# EAGLE board newt_mkr__v1_r1 (EAGLE 9.6.2)
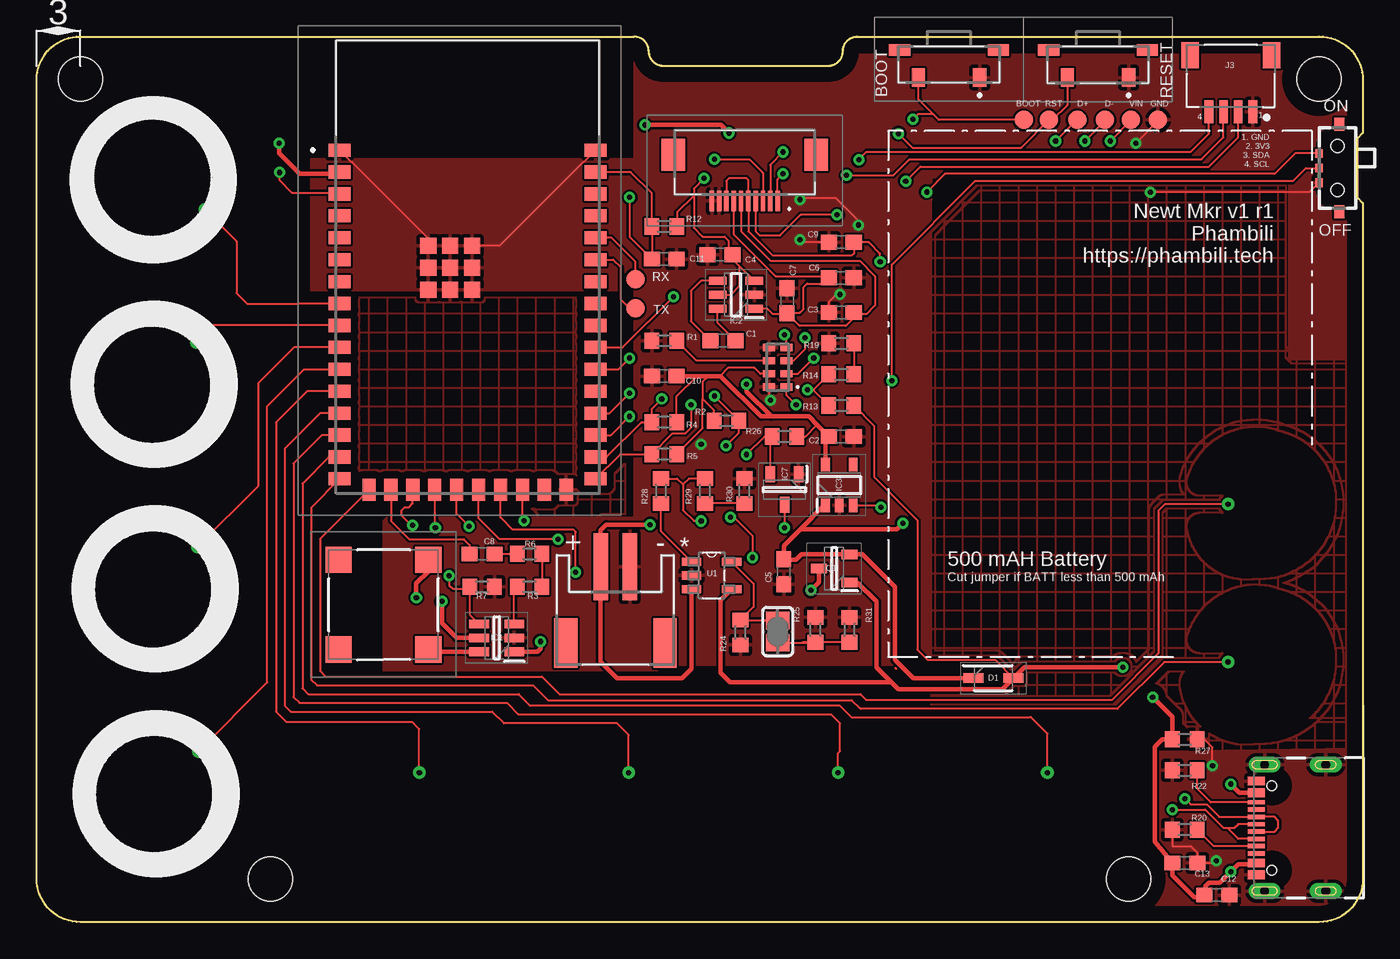
[diagram p0: board, top side]
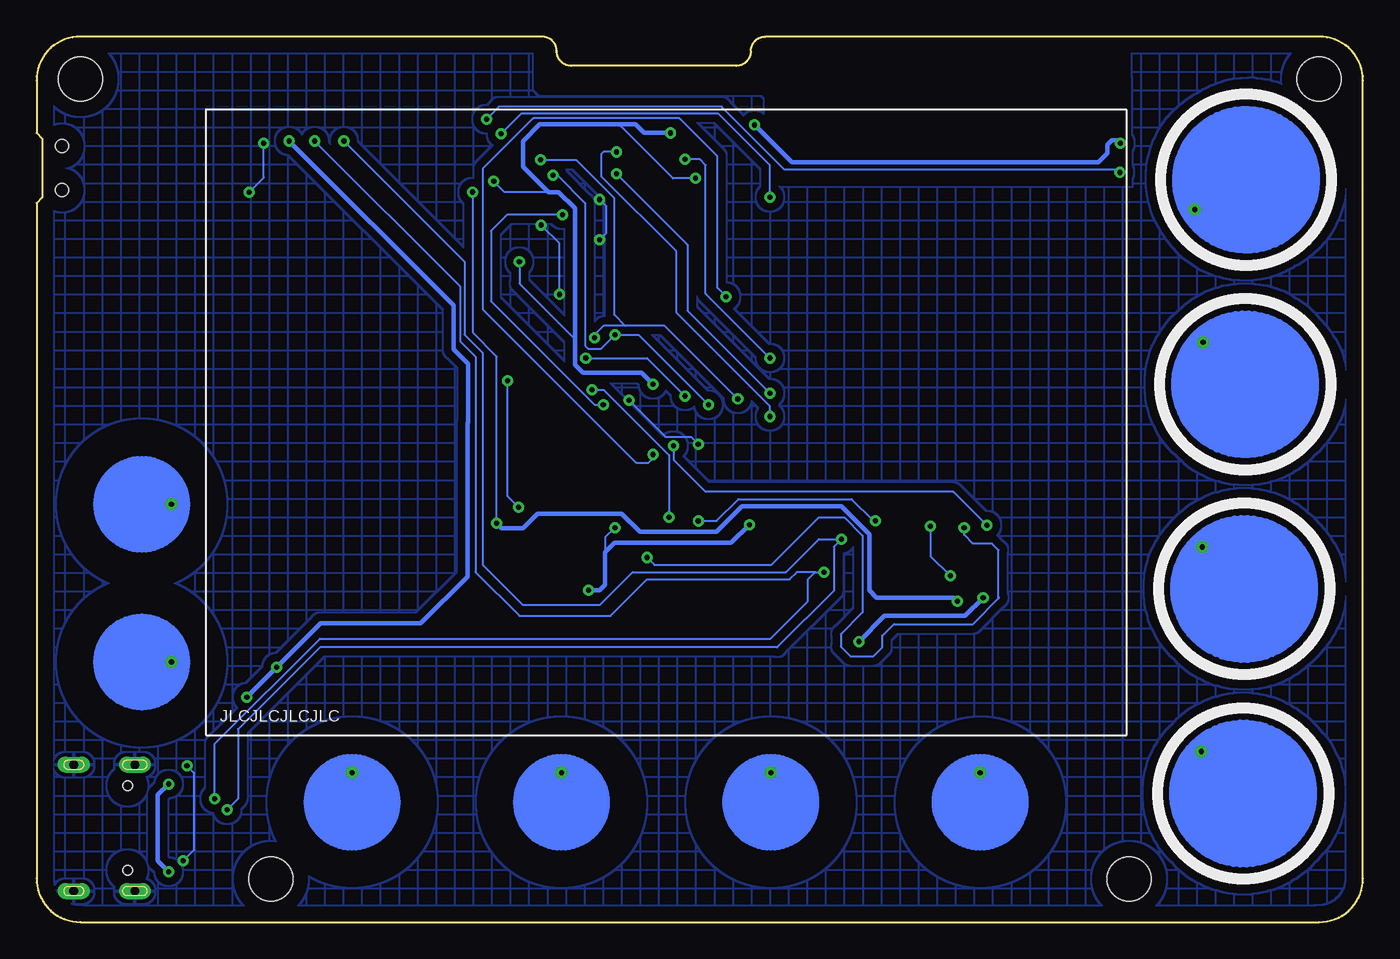
[diagram p1: board, bottom side, seen from below]

Size 90.8 x 60.6 mm. Coordinates in mm from the lower left corner, seen from the top.
Outline: 90.8,49.2 90.8,3 arc-90 87.8,0 3,0 arc-90 0,3 0,57.6 arc-90 3,60.6 40.9,60.6 arc-90 41.9,59.6 arc90 42.9,58.6 54.2,58.6 arc90 55.2,59.6 arc-90 56.2,60.6 87.8,60.6 arc-90 90.8,57.6 90.8,54 90.4,53.6 90.4,49.6 90.8,49.2
Copper layers (1*16): Top 0.035mm / dielectric 1.5mm / Bottom 0.035mm
Design rules "default": minimum track width 6mil, minimum drill 0.35mm, track to track 6mil, track to pad 6mil, pad to pad 6mil, via to via 6mil, smd to smd 6mil, copper to edge 40mil, drill to drill 6mil, minimum pad ring 10mil, minimum via ring 8mil, stop-mask expansion 4mil, vias tented up to drill 0mil, thermal gap 10mil
Holes 3 mm at 74.75,2.95 16,2.95 87.8,57.7 3,57.7

## Footprints (pad centres in the part's own frame; a part is rotated, then mirrored left to right if it is on the bottom)
BUTTON_PASSIVE_6MM = drill 0.356: BUTTON 0,2.032
BUTTON_PASSIVE_10MM = drill 0.356: BUTTON 0,4.064
C0603 = smd 1.1 x 1: 1 -0.85,0; 2 0.85,0
JST-PH-2-SMT-RA = smd 1 x 4.6: 1 1,-3.7; 2 -1,-3.7 | smd 1.6 x 3.4: NC1 -3.4,1.5; NC2 3.4,1.5
SODFL3517X110N = smd 1.37 x 0.63: 1 -1.375,0; 2 1.375,0
SOT95P280X145-6N = smd 1.35 x 0.6: 1 -1.2,0.95; 2 -1.2,0; 3 -1.2,-0.95; 4 1.2,-0.95; 5 1.2,0; 6 1.2,0.95
SOT95P280X145-6N' = smd 1.2 x 0.55: 1 -1.25,0.95; 2 -1.25,0; 3 -1.25,-0.95; 4 1.25,-0.95; 5 1.25,0; 6 1.25,0.95
SOT95P280X130-5N = smd 0.9 x 0.6: 1 -1.4,0.95; 2 -1.4,0; 3 -1.4,-0.95; 4 1.4,-0.95; 5 1.4,0.95
ESP32S2WROVERIM22S2H3216UH3Q0 = smd 1.5 x 0.9: 1 -7.56,8.05; 2 -7.56,6.55; 3 -7.56,5.05; 4 -7.56,3.55; 5 -7.56,2.05; 6 -7.56,0.55; 7 -7.56,-0.95; 8 -7.56,-2.45; 9 -7.56,-3.95; 10 -7.56,-5.45; 11 -7.56,-6.95; 12 -7.56,-8.45; 13 -7.56,-9.95; 14 -7.56,-11.45; 15 -7.56,-12.95; 16 -7.56,-14.45; 27 9.94,-14.45; 28 9.94,-12.95; 29 9.94,-11.45; 30 9.94,-9.95; 31 9.94,-8.45; 32 9.94,-6.95; 33 9.94,-5.45; 34 9.94,-3.95; 35 9.94,-2.45; 36 9.94,-0.95; 37 9.94,0.55; 38 9.94,2.05; 39 9.94,3.55; 40 9.94,5.05; 41 9.94,6.55; 42 9.94,8.05 | smd 0.9 x 1.5: 17 -5.56,-15.2; 18 -4.06,-15.2; 19 -2.56,-15.2; 20 -1.06,-15.2; 21 0.44,-15.2; 22 1.94,-15.2; 23 3.44,-15.2; 24 4.94,-15.2; 25 6.44,-15.2; 26 7.94,-15.2 | smd 1.1 x 1.1: 43 0,0; 44 -1.5,0; 45 -1.5,1.5; 46 0,1.5; 47 1.5,1.5; 48 1.5,0; 49 1.5,-1.5; 50 0,-1.5; 51 -1.5,-1.5
SOT96P240X110-3N = smd 1.1 x 0.65: 1 -1.05,0.96; 2 -1.05,-0.96; 3 1.05,0
528921033 = smd 0.3 x 1.4: 1 -2.25,2.65; 2 -1.75,2.65; 3 -1.25,2.65; 4 -0.75,2.65; 5 -0.25,2.65; 6 0.25,2.65; 7 0.75,2.65; 8 1.25,2.65; 9 1.75,2.65; 10 2.25,2.65 | smd 1.6 x 2.2: MP1 -4.9,-0.5; MP2 4.9,-0.5
JST_SM04B-SRSS-TB(LF)(SN) = smd 0.6 x 1.55: 1 -1.5,0; 2 -0.5,0; 3 0.5,0; 4 1.5,0 | smd 1.2 x 1.8: S1 -2.8,-3.875; S2 2.8,-3.875
GCT_USB4105-GF-A = smd 0.6 x 1.15: A1_B12 -3.2,4.755; A4_B9 -2.4,4.755; B1_A12 3.2,4.755; B4_A9 2.4,4.755 | smd 0.3 x 1.15: A5 -1.25,4.755; A6 -0.25,4.755; A7 0.25,4.755; A8 1.25,4.755; B5 1.75,4.755; B6 0.75,4.755; B7 -0.75,4.755; B8 -1.75,4.755 | drill 0.6 pad 1.05 long: S1 -4.32,4.18; S4 4.32,4.18 | drill 0.6 pad 1 long: S2 -4.32,0; S3 4.32,0 | hole 0.65: 2.89,3.68; -2.89,3.68
CMT752580SMTTR = smd 1.8 x 1.8: 1 -3.075,3.05; 2 -3.075,-3.1; 3 3.075,-3.1; 4 3.075,3.05
R0603 = smd 1 x 1.1: 1 -0.85,0; 2 0.85,0
TL3330AF130QG = smd 0.9 x 1.27: 1 -2.1,1.385; 2 2.1,1.385 | smd 1.45 x 0.8: 3 -3.375,-0.5; 4 3.375,-0.5
SSAJ110100_1 = smd 0.6 x 0.51: 1 -3.75,2.53; 2 -2.75,2.53; 3 -1.75,2.53 | smd 0.9 x 0.7: 4 -5.75,1.14; 5 0.25,1.14 | hole 0.9: -4.25,1.25; -1.25,1.25
MICROBUILDER_SOLDERJUMPER_CLOSEDWIRE = smd 1.168 x 1.6: 1 -0.762,0; 2 0.762,0 | smd 0.635 x 0.203: WIRE 0,0
PAD.03X.05 = smd 1.27 x 1.27: P$1 0,0
SOT95P300X145-5N = smd 1.321 x 0.559: 1 -1.372,0.94; 2 -1.372,0; 3 -1.372,-0.94; 4 1.372,-0.94; 5 1.372,0.94
RV-8803-C7 = smd 0.5 x 0.8: 1 -1.35,-0.6; 2 -0.45,-0.6; 3 0.45,-0.6; 4 1.35,-0.6; 5 1.35,0.6; 6 0.45,0.6; 7 -0.45,0.6; 8 -1.35,0.6

## Placement (x,y rotation side)
B1  [BUTTON_PASSIVE_6MM]  83.6,28.6 270 bottom
B2  [BUTTON_PASSIVE_6MM]  83.6,17.8 270 bottom
B3  [BUTTON_PASSIVE_6MM]  69.2,8.2 0 bottom
B4  [BUTTON_PASSIVE_6MM]  54.87,8.2 0 bottom
B5  [BUTTON_PASSIVE_6MM]  40.53,8.2 0 bottom
B6  [BUTTON_PASSIVE_6MM]  26.2,8.2 0 bottom
B7  [BUTTON_PASSIVE_10MM]  8,50.8 120 bottom
B8  [BUTTON_PASSIVE_10MM]  8.07,36.8 45 bottom
B9  [BUTTON_PASSIVE_10MM]  8.13,22.8 45 bottom
B10  [BUTTON_PASSIVE_10MM]  8.2,8.8 45 bottom
C1  1uF  [C0603]  47,39.78 0 top
C2  10 uF  [C0603]  55.09,33.23 180 top
C3  1uF  [C0603]  55.09,41.72 0 top
C4  10uF  [C0603]  46.78,45.67 0 top
C5  10 uF  [C0603]  51.16,23.97 90 top
C6  1uF  [C0603]  55.09,44.1 180 top
C7  10uF  [C0603]  51.37,42.52 270 top
C8  0.1uF  [C0603]  30.5,25.2 0 top
C9  0.1uF  [C0603]  55.09,46.52 0 top
C10  0.1uF  [C0603]  42.97,37.37 180 top
C11  1uF  [C0603]  42.97,45.37 180 top
C12  0.1uF  [C0603]  80.8,1.85 0 top
C13  10uF  [C0603]  78.6,4.05 0 top
CN1  [JST-PH-2-SMT-RA]  39.62,20.61 180 top
D1  PMEG2010ER,115  [SODFL3517X110N]  65.5,16.7 0 top
IC1  PAM8301AAF  [SOT95P280X145-6N]  31.5,19.45 180 top
IC2  AP3602AKTR-G1  [SOT95P280X145-6N']  47.88,42.93 180 top
IC3  XC6220B331MR-G  [SOT95P280X130-5N]  54.95,29.91 90 top
IC4  ESP32-S2-WROVER-I_M22S2H3216UH  [ESP32S2WROVERIM22S2H3216UH3Q0]  28.32,44.78 0 top
IC7  APX803L40-36SA-7  [SOT96P240X110-3N]  51.2,29.6 270 top
J1  52892-1033  [528921033]  48.47,52 180 top
J3  SM04B-SRSS-TB(LF)(SN)  [JST_SM04B-SRSS-TB(LF)(SN)]  81.75,55.45 180 top
J4  USB4105-GF-A  [GCT_USB4105-GF-A]  88.25,6.45 90 top
LS1  CMT-7525-80-SMT-TR  [CMT752580SMTTR]  23.75,21.7 180 top
Q1  DMG2301L-7  [SOT96P240X110-3N]  54.6,24.2 180 top
R1  10K  [R0603]  42.97,39.78 180 top
R2  10K  [R0603]  47.23,34.31 0 top
R3  10K  [R0603]  33.75,22.95 0 top
R4  10K  [R0603]  42.97,34.22 0 top
R5  10K  [R0603]  42.97,32.02 0 top
R6  10K  [R0603]  33.75,25.2 180 top
R7  100K  [R0603]  30.5,22.95 0 top
R12  10K  [R0603]  42.97,47.6 0 top
R13  10k  [R0603]  55.09,35.35 180 top
R14  5.1k  [R0603]  55.09,37.48 180 top
R19  10k  [R0603]  55.09,39.6 0 top
R20  5.1k  [R0603]  78.6,6.33 180 top
R22  5.1k  [R0603]  78.6,10.38 180 top
R24  5.1k  [R0603]  48.18,19.82 90 top
R25  5.1k  [R0603]  53.31,20 270 top
R26  10k  [R0603]  51.2,33.23 0 top
R27  100k  [R0603]  78.6,12.5 0 top
R28  10k  [R0603]  42.75,29.5 90 top
R29  5.1k  [R0603]  45.75,29.5 90 top
R30  10k  [R0603]  48.45,29.5 270 top
R31  10k  [R0603]  55.65,20 270 top
S7  TL3330AF130QG  [TL3330AF130QG]  62.46,59.18 180 top
S8  TL3330AF130QG  [TL3330AF130QG]  72.66,59.17 180 top
S17  SSAJ110100  [SSAJ110100_1]  90.31,54.35 90 top
SJ2  [MICROBUILDER_SOLDERJUMPER_CLOSEDWIRE]  50.73,19.88 270 top
TP1  TEST-POINT3X5  [PAD.03X.05]  41,44 0 top
TP2  TEST-POINT3X5  [PAD.03X.05]  41,42 0 top
TP3  TEST-POINT3X5  [PAD.03X.05]  67.58,54.9 180 top
TP4  TEST-POINT3X5  [PAD.03X.05]  69.3,54.9 0 top
TP5  TEST-POINT3X5  [PAD.03X.05]  76.77,54.9 0 top
TP6  TEST-POINT3X5  [PAD.03X.05]  74.93,54.9 0 top
TP7  TEST-POINT3X5  [PAD.03X.05]  71.24,54.9 180 top
TP8  TEST-POINT3X5  [PAD.03X.05]  73.14,54.9 180 top
U1  MCP73831T-2ATI/OT  [SOT95P300X145-5N]  46.21,23.72 0 top
Y1  RV-3028-C7_32.768KHZ_1PPM_TA_Q  [RV-8803-C7]  50.74,37.97 90 top

## Library data of the parts
B1-B10 = PatternAgents-TouchWidgets
C1-C13 = eagle-ltspice; SPICEMODEL: NONE; SPICEPREFIX: C
CN1 R1-R7 R12-R14 R19 R20 R22 R24-R31 = adafruit
D1 = PMEG2010ER_115; DESCRIPTION: NXP PMEG2010ER,115 SMT Schottky Diode, 20V 1A, 2-Pin SOD-123; HEIGHT: 1.1mm; MANUFACTURER_NAME: Nexperia; MANUFACTURER_PART_NUMBER: PMEG2010ER,115; MOUSER_PART_NUMBER: 771-PMEG2010ER115; MOUSER_PRICE-STOCK: https://www.mouser.co.uk/ProductDetail/Nexperia/PMEG2010ER115?qs=LMSg3oBIm%2FjLN28PGE8ULg%3D%3D
IC1 = PAM8301AAF; DESCRIPTION: Audio Amplifiers 1.5W MONO FILTERLESS CLASS-D AUDIO AMP; HEIGHT: 1.45mm; MANUFACTURER_NAME: Diodes Inc.; MANUFACTURER_PART_NUMBER: PAM8301AAF; MOUSER_PART_NUMBER: 621-PAM8301AAF; MOUSER_PRICE-STOCK: https://www.mouser.co.uk/ProductDetail/Diodes-Incorporated/PAM8301AAF?qs=pYVYkI7xuRV6vlW3YKulRw%3D%3D
IC2 = AP3602AKTR-G1; DESCRIPTION: Switching Voltage Regulators LED Backlight; HEIGHT: 1.45mm; MANUFACTURER_NAME: Diodes Inc.; MANUFACTURER_PART_NUMBER: AP3602AKTR-G1; MOUSER_PART_NUMBER: 621-AP3602AKTR-G1; MOUSER_PRICE-STOCK: https://www.mouser.co.uk/ProductDetail/Diodes-Incorporated/AP3602AKTR-G1?qs=5V6w%252Be2aIqZe7SZnxovZqw%3D%3D
IC3 = XC6220B331MR-G; DESCRIPTION: TOREX - XC6220B331MR-G - IC, LDO, 1A, 3.3V, SOT-25; HEIGHT: 1.3mm; MANUFACTURER_NAME: Torex; MANUFACTURER_PART_NUMBER: XC6220B331MR-G; MOUSER_PART_NUMBER: 865-XC6220B331MR-G; MOUSER_PRICE-STOCK: https://www.mouser.co.uk/ProductDetail/Torex-Semiconductor/XC6220B331MR-G?qs=AsjdqWjXhJ8lRh0WBUyqoQ%3D%3D
IC4 = ESP32-S2-WROVER-I_M22S2H3216UH; DESCRIPTION: WiFi Modules (802.11) Module ESP32-S2 WROVER IPEX ANT; HEIGHT: 3.45mm; MANUFACTURER_NAME: Espressif Systems; MANUFACTURER_PART_NUMBER: ESP32-S2-WROVER-I(M22S2H3216UH3Q0); MOUSER_PART_NUMBER: 356-ESP32S2WRVI321PH; MOUSER_PRICE-STOCK: https://www.mouser.co.uk/ProductDetail/Espressif-Systems/ESP32-S2-WROVER-IM22S2H3216UH3Q0/?qs=vHuUswq2%252BszxnrhiZVBtvw%3D%3D
IC7 = APX803L40-36SA-7; DESCRIPTION: Supervisory Circuits 3.6V, 450ms Reset Ge nerator; HEIGHT: 1.1mm; MANUFACTURER_NAME: Diodes Inc.; MANUFACTURER_PART_NUMBER: APX803L40-36SA-7
J1 = 52892-1033; DESCRIPTION: MOLEX - 52892-1033 - FFC / FPC Board Connector, ZIF, 0.5 mm, 10 Contacts, Receptacle, Easy-On 52892 Series; HEIGHT: 2mm; MANUFACTURER_NAME: Molex; MANUFACTURER_PART_NUMBER: 52892-1033; MOUSER_PART_NUMBER: 538-52892-1033; MOUSER_PRICE-STOCK: https://www.mouser.co.uk/ProductDetail/Molex/52892-1033/?qs=s7UCm7gO1bYFQIHRMDmdTA%3D%3D
J3 = SM04B-SRSS-TB_LF__SN_; DESCRIPTION: Connector Header Surface Mount, Right Angle 4 position 0.039 (1.00mm); DIGI-KEY_PART_NUMBER: 455-1804-1-ND; MF: JST Sales; MP: SM04B-SRSS-TB(LF)(SN); PACKAGE: None; PURCHASE-URL: https://pricing.snapeda.com/search/part/SM04B-SRSS-TB(LF)(SN)/?ref=eda
J4 = USB4105-GF-A; AVAILABILITY: In Stock; DESCRIPTION: USB-C (USB TYPE-C) USB 2.0 Receptacle Connector 24 (16+8 Dummy) Position Surface Mount, Right Angle; Through Hole; MF: GCT; MP: USB4105-GF-A; PACKAGE: None; PRICE: None; PURCHASE-URL: https://pricing.snapeda.com/search/part/USB4105-GF-A/?ref=eda
LS1 = CMT-7525-80-SMT-TR; DESCRIPTION: Piezo Buzzers & Audio Indicators buzzer, 7.5 mm, 2.5 mm deep, M, 3.6 V, 80 dB, Surface Mount (SMT), Audio Transducer; HEIGHT: 2.7mm; MANUFACTURER_NAME: CUI Inc.; MANUFACTURER_PART_NUMBER: CMT-7525-80-SMT-TR; MOUSER_PART_NUMBER: 490-CMT-7525-80SMTTR; MOUSER_PRICE-STOCK: https://www.mouser.co.uk/ProductDetail/CUI-Devices/CMT-7525-80-SMT-TR?qs=P1JMDcb91o5izP7Xira9ww%3D%3D
Q1 = DMG2301L-7; DESCRIPTION: MOSFET MOSFET BVDSS; HEIGHT: 1.1mm; MANUFACTURER_NAME: Diodes Inc.; MANUFACTURER_PART_NUMBER: DMG2301L-7; MOUSER_PART_NUMBER: 621-DMG2301L-7; MOUSER_PRICE-STOCK: https://www.mouser.co.uk/ProductDetail/Diodes-Incorporated/DMG2301L-7/?qs=60RJRzIpcl8mqpUzCaZuxQ%3D%3D
S7 S8 = TL3330AF130QG; DESCRIPTION: E-SWITCH - TL3330AF130QG - SWITCH, TACTILE, SPST, 50mA, 12VDC; HEIGHT: 3.4mm; MANUFACTURER_NAME: E-Switch; MANUFACTURER_PART_NUMBER: TL3330AF130QG; MOUSER_PART_NUMBER: 612-TL3330AF130QG; MOUSER_PRICE-STOCK: https://www.mouser.co.uk/ProductDetail/E-Switch/TL3330AF130QG?qs=cyOInwlKnROuSmh9LtfUhw%3D%3D
S17 = SSAJ110100; DESCRIPTION: Slide Switches slide switch with location lug; HEIGHT: mm; MANUFACTURER_NAME: ALPS; MANUFACTURER_PART_NUMBER: SSAJ110100; MOUSER_PART_NUMBER: 688-SSAJ110100; MOUSER_PRICE-STOCK: https://www.mouser.co.uk/ProductDetail/ALPS/SSAJ110100?qs=35GPJvxY%252Bl7i4HLNNvKQzg%3D%3D
SJ2 = Adafruit AT42QT1010 Breakout
TP1-TP8 = SparkFun-Connectors
U1 = Microchip_By_element14_Batch_1; MPN: MCP73831T-2ATI/OT; OC_FARNELL: 1834890; OC_NEWARK: 84R5196; PACKAGE: SOT23-5; SUPPLIER: Microchip
Y1 = RV-3028-C7_32.768kHz_1ppm_TA_Q; DESCRIPTION: Real Time Clock 32.768kHz I2C Time Acc. 1ppm; HEIGHT: mm; MANUFACTURER_NAME: Micro Crystal AG; MANUFACTURER_PART_NUMBER: RV-3028-C7 32.768kHz 1ppm TA QA; MOUSER_PART_NUMBER: 428-203603-MG01; MOUSER_PRICE-STOCK: https://www.mouser.co.uk/ProductDetail/Micro-Crystal/RV-3028-C7-32768kHz-1ppm-TA-QA/?qs=u16ybLDytRbtEIHDRVfMwQ%3D%3D

## Nets
3.3EN: IC3.3 S17.2
+3V3: C2.2 C4.2 C9.2 C10.1 IC2.3 IC2.5 IC3.5 IC4.2 J1.5 J1.8 J3.2 R2.1 R4.2 R5.2 R12.2 R26.2 Y1.7
+5V: C3.2 C6.2 C7.2 IC2.1 J1.6 J1.7
BOOT: IC4.3 S7.2 TP3.P$1
BUTTON_A: B1.BUTTON IC4.17
BUTTON_B: B2.BUTTON IC4.16
BUTTON_C: B3.BUTTON IC4.15
BUTTON_D: B4.BUTTON IC4.14
BUTTON_E: B5.BUTTON IC4.13
BUTTON_F: B6.BUTTON IC4.12
BUZZER: C8.1 IC4.18
CC2: J4.B5 R22.1
CHRG_STAT: IC4.24 R28.2 R29.2
D+: IC4.23 J4.A6 J4.B6 TP8.P$1
D-: IC4.22 J4.A7 J4.B7 TP7.P$1
DISPLAY_CS: IC4.32 J1.3
GND: C2.1 C3.1 C4.1 C5.1 C6.1 C7.1 C9.1 C10.2 C11.1 C12.2 C13.2 CN1.2 IC1.2 IC2.2 IC3.2 IC4.1 IC4.26 IC4.42 IC4.43 IC4.44 IC4.45 IC4.46 IC4.47 IC4.48 IC4.49 IC4.50 IC4.51 IC7.1 J1.9 J1.10 J3.1 J4.A1_B12 J4.B1_A12 J4.S1 J4.S2 J4.S3 J4.S4 R1.2 R7.2 R19.1 R20.2 R22.2 R24.1 R25.1 R27.2 R30.1 R31.1 S7.1 S8.1 S17.1 TP5.P$1 U1.2 Y1.5 Y1.8
LBO: IC4.33 IC7.2 R26.1
MISO: IC4.31
MOSI: IC4.29 J1.2
N$1: IC1.6 LS1.1
N$2: IC1.1 LS1.2
N$3: R1.1 Y1.6
N$4: R14.1 R19.2
N$5: C1.2 IC2.6
N$6: C1.1 IC2.4
N$7: IC1.3 R3.1
N$8: R29.1 R30.2
N$11: R25.2 R31.2 SJ2.2
N$12: R3.2 R6.1
N$13: C8.2 R6.2
N$15: J4.A5 R20.1
PAD_1: B7.BUTTON IC4.8
PAD_2: B8.BUTTON IC4.9
PAD_3: B9.BUTTON IC4.10
PAD_4: B10.BUTTON IC4.11
PROG: R24.2 SJ2.1 U1.5
PSRAM_CS: IC4.25
RESET: C11.2 IC4.41 R12.1 S8.2 TP4.P$1
RTC_CLKOUT: J1.4 Y1.1
RTC_INT: IC4.19 R2.2 Y1.2
RXD: IC4.38 TP1.P$1
SCK: IC4.30 J1.1
SCL: IC4.28 J3.4 R4.1 Y1.3
SDA: IC4.27 J3.3 R5.1 Y1.4
SPKR_CTRL: IC1.4 IC4.21 R7.1
STAT: R28.1 U1.1
TXD: IC4.37 TP2.P$1
USB_IN: IC4.20 R13.2 R14.2
VBATT: CN1.1 IC7.3 Q1.3 U1.3
VCC: C12.1 C13.1 D1.2 J4.A4_B9 J4.B4_A9 Q1.1 R13.1 R27.1 TP6.P$1 U1.4
VDD: C5.2 D1.1 IC1.5 IC3.1 Q1.2 S17.3

## Tracks (layer width: path | path; a pad name or v marks a point on that pad's centre or on a via)
3.3EN  (via drill 0.35)
  Top 0.152: IC3.3 57.69,28.51 v57.8,28.4 | S17.2 86.9,51.6 86,50.7 64.25,50.7 58.55,45 v58.55,37.05
  Bottom 0.152: v57.8,28.4 58.55,29.15 v58.55,37.05
+3V3  (via drill 0.35)
  Top 0.152: R4.2 43.82,35.99 45.2,37.37 45.4,37.37 | R2.1 46.38,35.02 45.6,35.8 | 45.6,35.8 45.6,36.97 46,37.37 | Y1.7 49.54,37.52 49.14,37.92 47.35,37.92 46.8,37.37 | R26.2 52.63,33.23 53.42,34.03 53.44,34.04 | R5.2 45.6,33.8 45.6,35.8 | C9.2 55.88,46.52 | IC2.5 47.53,42.93 48.13,43.53 48.13,44.88 | IC2.3 48.13,44.88 | 48.13,44.88 47.63,45.38 C4.2 47.4,45.9 47.4,46.6 47.1,46.9 45.6,46.9 45,47.5 45,49.7 | v59.5,50.7 60.5,51.7 80.25,51.7 82.25,53.7 J3.2 | J1.5 48.73,47.28 50.4,45.6 55.8,45.6 55.94,45.74 C9.2 | v57.75,45.2 57.75,45.75 56.98,46.52 C9.2 | R12.2 43.86,47.56 43.86,48.56 45,49.7 | v45.7,50.9 45,50.2 45,49.7 | J1.5 48.73,49.38 | J1.5 48.73,50.78 48.6,50.9 47.4,50.9 47.23,50.73 J1.8
  Top 0.305: 53.44,34.04 52.87,34.6 50.3,34.6 | 50.3,34.6 49.6,34.6 46.83,37.37 46.8,37.37 46,37.37 45.4,37.37 C10.1 | 50.3,34.6 48.6,36.3 v48.6,36.8 | IC3.5 54,32.99 C2.2 54.18,33.23 54.18,33.27 53.42,34.03 | IC4.2 20.63,51.2 18,51.2 16.6,52.6 v16.6,53.3 | v41.65,54.55 46.85,54.55 v47.4,54
  Bottom 0.152: v57.75,45.2 57.75,43.7 53.95,39.9 | v45.7,50.9 47.24,50.9 50.8,54.46 50.8,54.6 | 55.5,49.95 58.75,49.95 v59.5,50.7
  Bottom 0.305: v48.6,36.8 49.4,37.6 53.4,37.6 53.95,38.15 53.95,39.9 53.95,48.85 55.05,49.95 55.5,49.95 55.75,49.95 57.5,51.7 57.5,53.45 56.35,54.6 50.8,54.6 49.8,54.6 49.2,54 v47.4,54 | v41.65,54.55 39.1,52 18.1,52 17.5,52.6 17.5,53.2 17.2,53.5 16.8,53.5 v16.6,53.3
+5V
  Top 0.152: 55.94,41.6 55.94,41.34 55.4,40.8 52.24,40.8 C7.2 | 55.94,41.6 C3.2 | J1.7 47.73,47.08 50.6,44.2 54.14,44.2 C6.2 54.24,43.94 54,43.7 52.75,43.7 52.5,43.45 52.5,41.95 52.25,41.7 51.4,41.7 C7.2 | 55.94,41.6 56.8,41.6 57.4,42.2 57.4,44.2 56.35,45.25 50.25,45.25 48.23,47.28 J1.6 | C7.2 51.3,41.6 50.4,41.6 50.02,41.98 IC2.1
BOOT  (via drill 0.35)
  Top 0.152: v16.65,51.3 16.65,50.75 17.48,49.93 20.66,49.93 IC4.3 | S7.2 60.36,56.3 61.34,55.31 | v60,54.95 60.36,55.31 61.34,55.31 | TP3.P$1 61.76,54.9 61.34,55.31
  Top 0.305: IC4.3 20.73,49.8
  Bottom 0.152: v16.65,51.3 16.85,51.5 39.6,51.5 43.9,55.8 59.15,55.8 v60,54.95
BUTTON_A
  Top 0.152: IC4.17 19.4,26.22 19.4,17.2 19.8,16.8 34.6,16.8 35.8,15.6 56.4,15.6 56.8,15.2 73.6,15.2 76.8,18.4 76.8,28.15 77.25,28.6 B1.BUTTON
BUTTON_B
  Top 0.152: IC4.16 18.8,28.37 18.8,16.6 19.2,16.2 34,16.2 35,15.2 55.8,15.2 56.4,14.6 74,14.6 77.2,17.8 B2.BUTTON
  Bottom 0.152: 81.47,17.7 B2.BUTTON 81.52,17.75
BUTTON_C
  Top 0.152: IC4.15 20.03,31.83 18.2,30 18.2,16 18.6,15.6 33,15.6 33.8,14.8 55,14.8 55.77,14.03 68,14.03 68.07,14.03 69.2,12.9 B3.BUTTON
BUTTON_D
  Top 0.152: IC4.14 19.53,33.33 17.6,31.4 17.6,15.4 18,15 32.2,15 33,14.2 54.4,14.2 55,13.6 55,11.7 54.87,11.57 B4.BUTTON
BUTTON_E
  Top 0.152: IC4.13 19.43,34.83 17,32.4 17,14.8 17.4,14.4 31.2,14.4 32,13.6 39.75,13.6 40.53,12.82 B5.BUTTON
  Bottom 0.152: B5.BUTTON 40.5,10.27
BUTTON_F
  Top 0.152: IC4.12 18.53,36.33 16.4,34.2 16.4,14.4 17.1,13.7 25.7,13.7 26.1,13.3 26.2,13.2 B6.BUTTON
BUZZER
  Top 0.152: IC4.18 24.26,27.44 25.5,26.2 29.25,26.2 29.65,25.8 C8.1
CC2
  Top 0.152: J4.B5 80.38,8.2 79.45,9.13 R22.1
CHRG_STAT  (via drill 0.35)
  Top 0.152: 42.85,30.35 R28.2 43.85,30.35 44.25,29.95 | R29.2 44.65,30.35 44.25,29.95 | 44.25,29.95 44.25,28.2 45,27.45 v45.5,27.45 | v33.37,27.47 33.26,27.58 IC4.24
  Bottom 0.152: v33.37,27.47 33.52,27.47 35,28.95 42.75,28.95 44.25,27.45 v45.5,27.45
D+  (via drill 0.35)
  Top 0.152: v36.9,23.95 36.9,26.7 36.75,26.85 32.6,26.85 31.76,27.69 IC4.23 | J4.A6 84.75,6.2 85,6.45 85,6.95 84.75,7.2 J4.B6 80.95,7.2 80.1,8.05 79.01,8.05 v78.61,8.45 | TP8.P$1 73.14,54.84 v71.75,53.45
  Bottom 0.152: v71.75,53.45 61.8,43.51 61.8,39.76 60.75,38.7 60.75,23.95 57.75,20.95 51.5,20.95 49,23.45 39.25,23.45 38.75,23.95 37.5,23.95 | 37.5,23.95 v36.9,23.95 | 37.5,23.95 38,23.45 38,21.95 40.55,19.4 71.4,19.4 78.61,12.19 v78.61,8.45
D-  (via drill 0.35)
  Top 0.152: v35.7,26.2 31.7,26.2 30.26,27.64 IC4.22 | J4.A7 82.25,6.7 82,6.45 81.5,6.45 | J4.B7 82.25,5.7 81.5,6.45 | v77.75,7.7 80,7.7 81.25,6.45 81.5,6.45 | TP7.P$1 71.21,54.9 v69.76,53.45 v69.75,53.45
  Bottom 0.152: v77.75,7.7 77,8.45 77,13.2 71.4,18.8 40.1,18.8 36.23,22.68 36.23,25.68 v35.7,26.2 37.25,26.2 39.5,23.95 50,23.95 52.25,21.7 57.5,21.7 60.25,24.45 60.25,38.95 61.5,40.2 61.5,45.19 v69.76,53.45
DISPLAY_CS  (via drill 0.35)
  Top 0.152: IC4.32 39.83,37.83 v40.6,38.6 | v46.4,52.2 48.8,52.2 49.73,51.28 J1.3
  Bottom 0.152: v40.6,38.6 45,43 45,51.8 45.4,52.2 v46.4,52.2
GND  (via drill 0.35)
  Top 0.152: IC4.1 21.58,52.01 21.61,52.01 26.82,46.79 IC4.45 | IC4.42 37.44,52.01 37.41,52.01 31.69,46.28 IC4.47 | C3.1 54.24,42.44 54.75,42.95 v55,42.95 | C9.1 52.43,46.52 v52.25,46.7 | v52.25,49.45 52.35,49.55 54.71,49.55 56.25,48.01 v56.25,47.7 | Y1.8 50.14,36.06 50.25,35.95 v50.25,35.7 | 36.26,29.21 IC4.26 | S17.1 87.13,49.95 v76.25,49.95 | v75.25,53.31 76.77,54.83 TP5.P$1 | R20.2 77.75,5.2 79,5.2 79.45,4.75 C13.2 80.6,4.05 v80.75,4.2 | v80.5,10.7 80.5,11.95 79.95,12.5 R27.2
  Bottom 0.152: v55,42.95 55,46.45 v56.25,47.7 | v50.25,35.7 47.76,33.21 46.95,33.21 46.94,33.2 46,33.2 v45.5,32.7 | v52.25,49.45 51.8,49.01 51.8,47.15 v52.25,46.7 | v76.25,49.95 75.25,50.95 v75.25,53.31 | v80.75,4.2 80,4.95 80,10.2 v80.5,10.7
  pour Top (isolate 0.508, hatched): 0.43,60.51 0.43,0.69 0.81,0.31 90.09,0.31 90.09,38.11 90,38.2 86,38.2 85.5,38.7 85.5,50.45 61.5,50.45 61.5,38.19 61.5,17.01 40.31,17.01 40.31,41.9 40.69,42.29 40.24,42.73 17.89,42.73 17.57,43.05 17.57,60.38 17.45,60.51
  pour Top: 42.4,52.19 18.78,52.19 18.78,43.24 42.4,43.24
  pour Top: 90.13,38.49 86.21,38.49 85.75,38.45 85.75,50.95 61.25,50.95 61.14,38.49 61.14,17.58 41.32,17.58 40.94,17.96 40.94,59.56 89.97,59.56
  pour Bottom (isolate 0.508, hatched): 15.79,50.35 15.73,50.29 39.92,50.29 41,51.37 41,56.38 41.13,56.51 56.37,56.51 56.82,56.95 56.82,59.56 57.45,60.19 90.28,60.19 90.41,60.07 90.41,0.31 90.79,-0.07 0.68,-0.07 0.55,0.06 0.55,60.26 0.62,60.32 15.79,60.32 15.86,60.26
  pour Top: 26.5,27.7 42.5,27.7 42.5,17.2 23.75,17.2 23.75,27.45 24,27.7
  pour Top: 90.5,11.91 90.5,2.2 88.75,0.45 76.5,0.45 76.5,11.7 76.75,11.7
  pour Top (isolate 0.02, hatched): 62,50.7 85.5,50.7 85.5,39.45 86,38.95 90,38.95 89.78,13.95 61.25,13.95 61.25,49.95
LBO  (via drill 0.35)
  Top 0.152: IC7.2 50.24,33.12 R26.1 49.83,33.23 v48.6,32 | IC4.33 40.13,39.33 v43.6,42.8
  Bottom 0.152: v43.6,42.8 44.2,43.4 44.2,52.4 46.8,55 56.8,55 60.25,51.55 60.25,41.95 49.75,31.45 48.9,31.45 48.6,31.75 v48.6,32
MOSI  (via drill 0.35)
  Top 0.152: IC4.29 39.33,33.33 v40.6,34.6 | v51.1,52.7 50.23,51.83 J1.2
  Bottom 0.152: v40.6,34.6 40.6,35.3 47,41.7 47,45.9 52.15,51.05 52.15,52.55 52,52.7 v51.1,52.7
N$1
  Top 0.305: 26.82,19.27 LS1.1 26.98,18.5 IC1.6
N$2  (via drill 0.35)
  Top 0.305: IC1.1 34.3,18.5 34.5,18.7 v34.5,19.2 | v26,22.2 26,23.2 26.82,24.02 LS1.2
  Bottom 0.305: v34.5,19.2 32.75,20.95 27.25,20.95 v26,22.2
N$3
  Top 0.152: Y1.6 45.18,38.42 R1.1
N$4
  Top 0.152: R19.2 R14.1
N$5
  Top 0.152: C1.2 46.63,41 IC2.6
N$6
  Top 0.152: IC2.4 45.48,43.88 44.8,43.2 44.8,41.13 C1.1
N$7
  Top 0.152: IC1.3 32.7,22.75 R3.1
N$8
  Top 0.152: R30.2 R29.1
N$9
  Top 0.152: 58.85,17.33 58.78,17.39
N$11
  Top 0.152: SJ2.2 52.4,19.12 | 52.4,19.12 53.28,19.12 R25.2 | R31.2 52.43,19.15 52.4,19.12
N$12
  Top 0.152: R6.1 R3.2
N$13
  Top 0.152: C8.2 R6.2
N$15
  Top 0.152: R20.1 80.58,5.2 J4.A5
PAD_1
  Top 0.152: IC4.8 18.34,42.33 17.96,42.33 14.42,42.33 13.7,43.05 13.7,46.59 B7.BUTTON
PAD_2
  Top 0.152: IC4.9 12.1,40.83 B8.BUTTON
PAD_3
  Top 0.152: B9.BUTTON 15.2,29.87 15.2,36.9 17.43,39.13 17.63,39.33 IC4.10 20.56,39.13
PAD_4
  Top 0.152: B10.BUTTON 15.8,16.4 15.8,35.3 18.33,37.83 IC4.11
PROG
  Top 0.152: U1.5 49.08,23.16 49.08,21.57 R24.2 50.7,20.67 SJ2.1
RESET  (via drill 0.35)
  Top 0.152: IC4.41 40.67,51.33 42.12,49.88 R12.1 C11.2 40.6,46.89 v40.6,49.6 | 69.55,54.65 TP4.P$1 | S8.2 70.56,55.91 69.55,54.9 TP4.P$1 | v59,53.95 59.95,53.01 67.41,53.01 TP4.P$1
  Bottom 0.152: v40.6,49.6 40.6,51.8 44.1,55.3 57.65,55.3 v59,53.95
RTC_CLKOUT  (via drill 0.35)
  Top 0.152: v52,35.4 51.34,36.06 Y1.1 | J1.4 49.23,47.28 49.5,47 50.9,47 52.3,48.4 v54.8,48.4
  Bottom 0.152: v52,35.4 52.6,35.4 59.7,42.5 59.7,47.3 58.6,48.4 v54.8,48.4
RTC_INT  (via drill 0.35)
  Top 0.152: Y1.2 52.12,37.52 v53.2,38.6 | v47.2,32.6 48.08,33.48 48.08,34.2 | 48.08,34.2 R2.2 | v46.4,36 48,34.4 48,34.28 48.08,34.2 | v25.75,27.15 25.65,27.15 25,27.8 25,28.2 25.2,28.4 25.5,28.4 25.76,28.66 IC4.19
  Bottom 0.152: v47.2,32.6 47.15,32.55 47.15,31.6 45,29.45 28.05,29.45 v25.75,27.15 | v53.2,38.6 49,38.6 v46.4,36
RXD
  Top 0.152: TP1.P$1 41,45.2 39.37,46.83 IC4.38
SCK  (via drill 0.35)
  Top 0.152: IC4.30 39.23,34.83 v40.6,36.2 | J1.1 50.73,50.83 v51.1,51.2
  Bottom 0.152: v51.1,51.2 46.25,46.35 46.25,41.85 v40.6,36.2
SCL  (via drill 0.35)
  Top 0.152: IC4.28 39.03,31.83 41.42,34.22 R4.1 42.12,35.12 v42.8,35.8 | v52.6,40 52.6,39.2 51.82,38.42 Y1.3 | v56.29,52.16 56.83,52.7 79,52.7 80.25,53.95 J3.4
  Bottom 0.152: v42.8,35.8 47.8,40.8 50.5,40.8 | 50.5,40.8 52,40.8 52.6,40.2 v52.6,40 | 50.5,40.8 51.25,41.55 51.25,49.55 53.86,52.16 v56.29,52.16
SDA  (via drill 0.35)
  Top 0.152: IC4.27 39.08,31.15 39.1,31.15 39.97,32.02 R5.1 43.54,33.44 44.41,33.44 44.8,33.83 v44.8,35.4 | Y1.4 51.34,40.06 v51.2,40.2 v51.2,40.19 | v55.45,51.1 58.65,51.1 59.75,52.2 79.75,52.2 81.25,53.7 J3.3
  Bottom 0.152: v44.8,35.4 49.59,40.19 v51.2,40.19 52.19,39.21 53,39.21 53.25,39.46 53.25,49.2 55.15,51.1 v55.45,51.1
SPKR_CTRL  (via drill 0.35)
  Top 0.152: IC1.4 29.65,21.05 R7.1 29.5,22.8 28.5,22.8 28.25,23.05 v28.25,23.7 | v29.6,27.1 28.76,27.94 IC4.21
  Bottom 0.152: v29.6,27.1 29.6,25.05 v28.25,23.7
STAT
  Top 0.152: U1.1 42.75,26.75 R28.1
TXD
  Top 0.152: IC4.37 39.47,45.33 40,44.8 40,42.6 40.6,42 TP2.P$1
USB_IN  (via drill 0.35)
  Top 0.152: R14.2 53.16,36.4 | 53.16,36.4 52.8,36.4 v52.77,36.43 | R13.2 53.19,36.4 53.16,36.4 | v47.5,27.7 47.75,27.7 49,26.45 v49,24.95 | v27.3,27 27.3,29.54 IC4.20
  Bottom 0.152: v52.77,36.43 51.98,36.43 47.5,31.95 v47.5,27.7 | v49,24.95 48.5,24.45 40.5,24.45 37.25,27.7 35.5,27.7 34.25,26.45 34.25,21.2 35.75,19.7 35.75,18.85 35.1,18.2 33.5,18.2 32.9,18.8 32.9,19.6 32.1,20.4 26.7,20.4 24.95,22.15 | 24.95,22.15 24.9,22.2 | 24.95,22.15 24.95,25.45 25.4,25.9 26.7,25.9 27.3,26.5 v27.3,27
VBATT  (via drill 0.35)
  Top 0.152: IC7.3 v51.2,27
  Top 0.203: 38.62,24.2 38.62,23.52
  Top 0.305: U1.3 44.84,17.34 44.2,16.7 39.75,16.7 38.62,17.83 38.62,24.2 | 38.62,24.2 CN1.1 38.62,26.82 39,27.2 v42,27.2 | 38.75,26.45 38.75,24.33 38.62,24.2 | Q1.3 53.55,23.25 v53,22.7
  Bottom 0.152: v51.2,27 51.88,26.32 51.88,25.32
  Bottom 0.305: v53,22.7 52.25,22.7 51.88,23.07 51.88,25.32 51.25,25.95 43.25,25.95 v42,27.2
VCC  (via drill 0.35)
  Top 0.152: R13.1 57.34,33.95 57.34,30.46 60.3,27.5 60.3,18.65 61,17.95 65.62,17.95 D1.2 | TP6.P$1 74.93,54.88 v73.5,53.45
  Top 0.305: U1.4 46.83,22.03 46.83,17.05 47.46,16.43 58.52,16.43 | J4.B4_A9 82.35,8.85 v81.75,9.45 | Q1.1 56.21,23.24 57.5,21.95 57.5,17.45 58.52,16.43 | 58.52,16.43 59,15.95 66.12,15.95 D1.2 67.62,17.45 v74.35,17.45 | v76.4,15.4 77.75,14.05 R27.1 77.05,12.5 76.56,12.01 76.56,5.5 C13.1 77.75,3.2 79.25,1.7 79.8,1.7 C12.1 80,1.9 80,2.45 80.25,2.7 81,2.7 v81.75,3.45 82.25,3.95 83.39,3.95 J4.A4_B9
  Bottom 0.305: v76.4,15.4 v74.35,17.45 71.35,20.45 64.5,20.45 61.3,23.65 61.3,34.15 61.25,34.2 61.25,38.2 62.25,39.2 62.25,42.2 v73.5,53.45 | v81.75,9.45 82.5,8.7 82.5,4.2 v81.75,3.45
VDD  (via drill 0.35)
  Top 0.152: v60.95,49.96 62.19,51.2 84.75,51.2 86.15,52.6 S17.3
  Top 0.305: IC3.1 53.91,28.51 52.3,26.9 | 52.3,26.9 51.16,25.76 C5.2 51.18,24.8 52,24.8 52.36,25.16 Q1.2 56.54,25.16 58.75,22.95 58.75,17.95 58.93,17.77 58.94,17.77 60.02,16.7 D1.1 | IC1.5 28.75,19.45 27.75,20.45 v27.75,21.95 | 52.3,26.9 58.9,26.9 v59.3,27.3
  Bottom 0.152: v59.3,27.3 59.3,38.7 60.95,40.35 v60.95,49.96
  Bottom 0.305: v59.3,27.3 58.95,26.95 57.5,26.95 56.5,27.95 50.75,27.95 49.5,26.7 44.25,26.7 42.5,28.45 35.7,28.45 33.8,26.55 33.8,22.7 33.3,22.2 28,22.2 v27.75,21.95

## Text on the board
tPlace: BOOT | BOOT | RST | D+ | D- | VIN | GND | RESET | 4 | 1 | ON | 1. GND / 2. 3V3 / 3. SDA / 4. SCL | OFF | Newt Mkr v1 r1 / Phambili / https://phambili.tech | RX | TX | 500 mAH Battery | Cut jumper if BATT less than 500 mAh
bPlace: JLCJLCJLCJLC
Document: Notes and Dimensions on Document Layer / Miter of 3mm on corners / Miter of 1 on film cutout / Drill 3mm